# Altium PCB SkateInfoView.PcbDoc
Units mil, origin at the board's own origin, x right, y up, seen from the top; angles counter-clockwise.
Board outline 2500 x 1200 mil, 2 copper layers (Top Layer, Bottom Layer), stack 61.811 mil thick; 20 components, 13 nets, 77 pads, 13 vias.
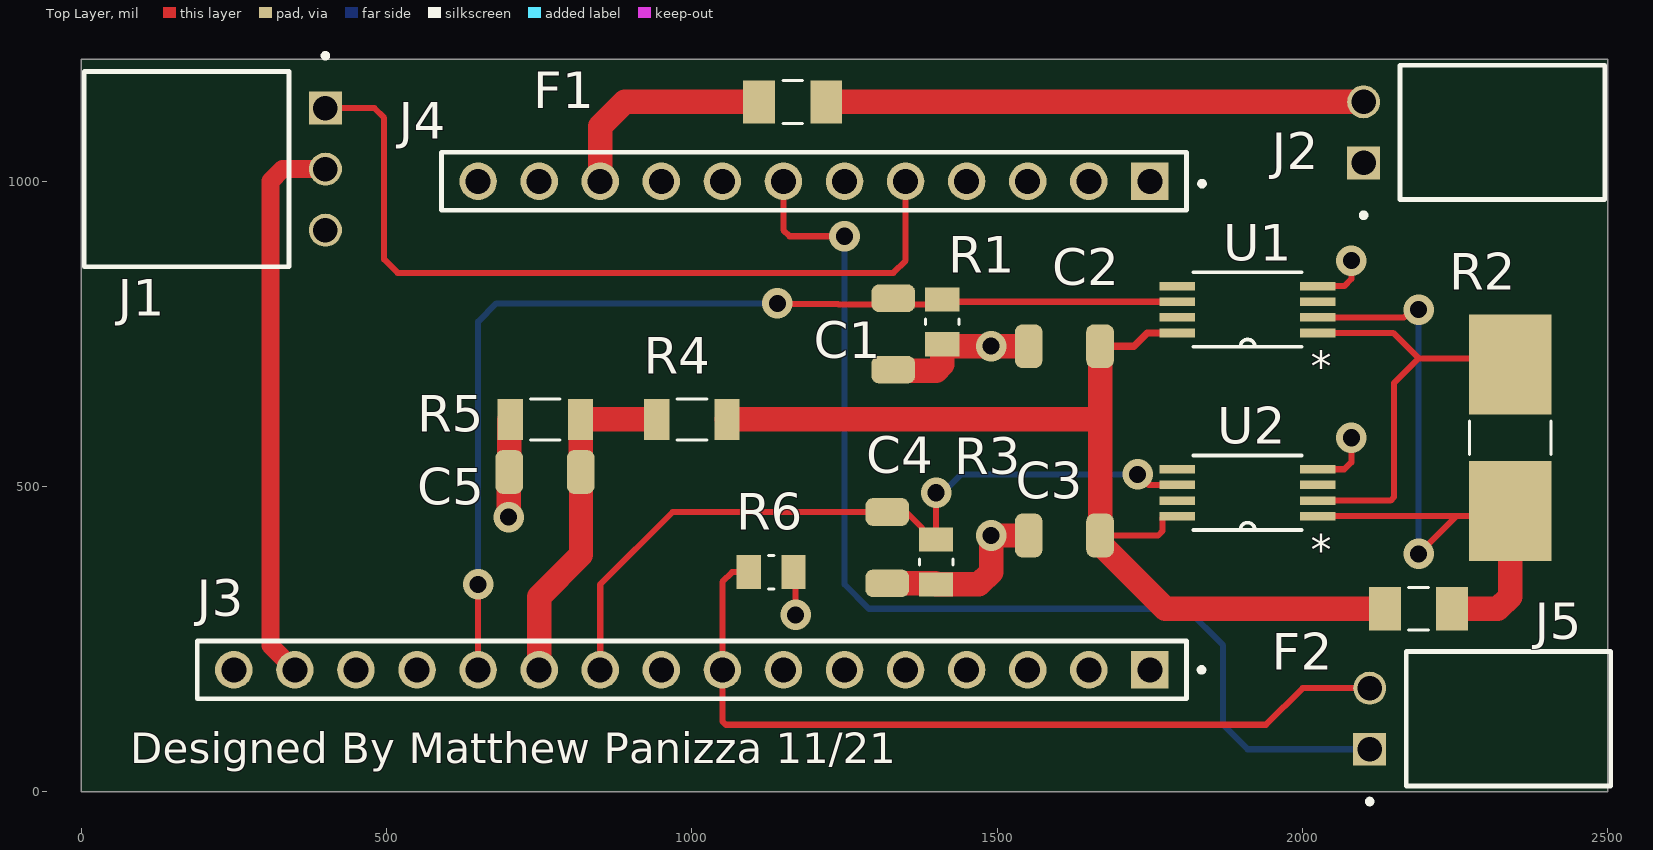
[diagram p0: Top Layer view]
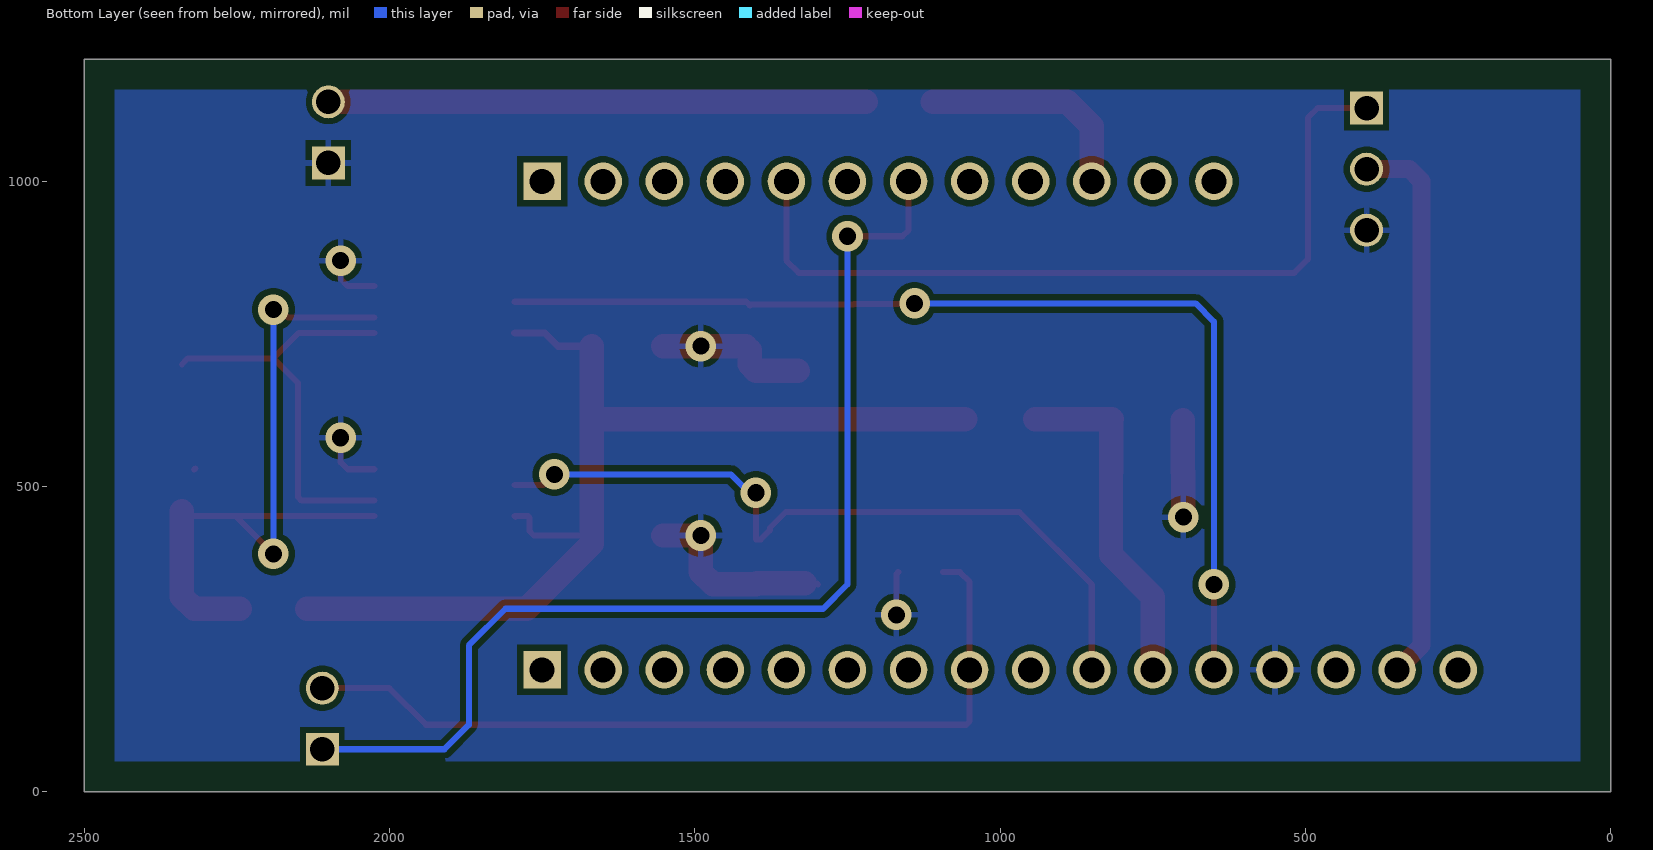
[diagram p1: Bottom Layer view, seen from below]
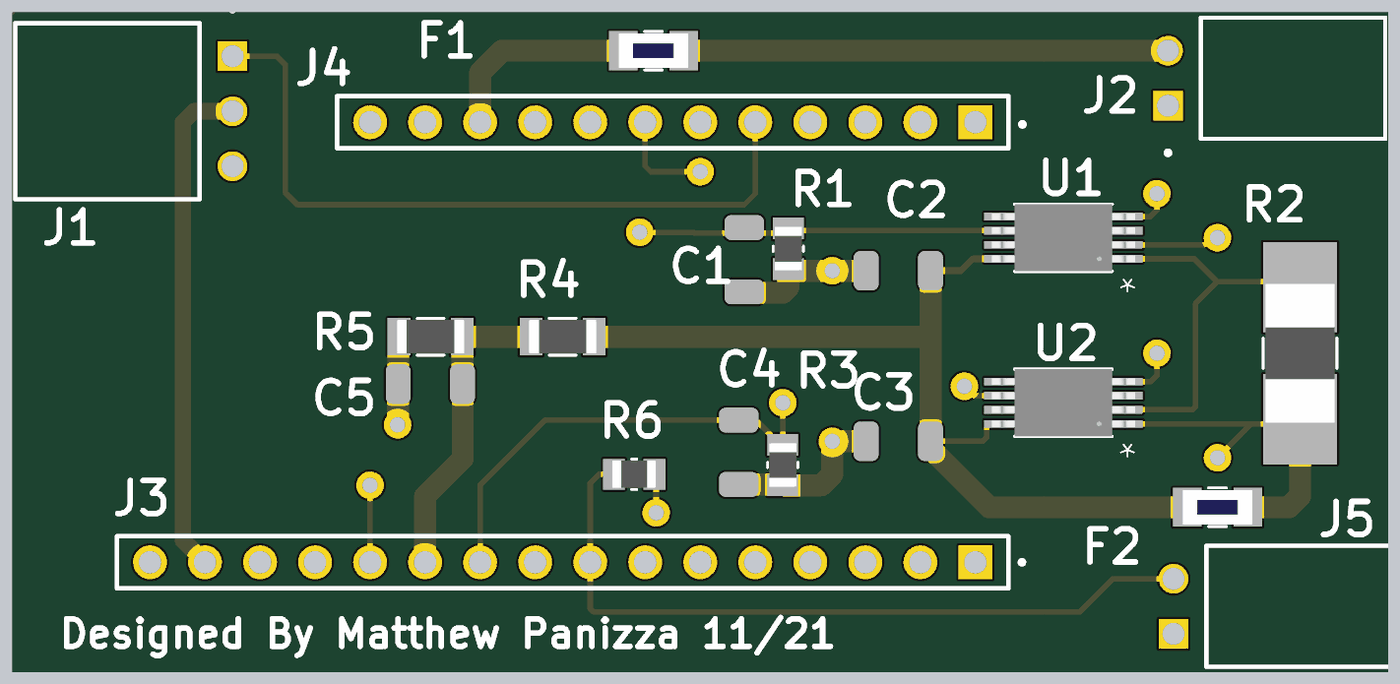
[diagram p2: 3D render of the assembled board from above, using the file's embedded part models]

## Layer stack, top to bottom
Top Solder: solder mask 0.3937, SM-001, Dk 4
Top Layer: signal copper 1.378
Dielectric 1: dielectric 59.0551, FR-4, Dk 4.8
Bottom Layer: signal copper 1.378
Bottom Solder: solder mask 0.3937, SM-001, Dk 4

## Board outline
0,1200 2500,1200 2500,0 0,0

## Design rules (kind name [scope] priority, off if disabled: settings)
Clearance [All] p1: gap=10 ignorepadtopadclearanceinfootprint=TRUE
PolygonConnect [All] p1: connectstyle=Relief reliefconductorwidth=10 reliefentries=4 polygonreliefangle="90 Angle" airgapwidth=10
RoutingVias [All] p1: holewidth=12 width=25 viastyle="Through Hole" minholewidth=12 minwidth=25 maxholewidth=12 maxwidth=25
SolderMaskExpansion [All] p1: expansion=4 istentingtop=FALSE
Width [All] p1: maxlimit=40 minlimit=10 preferedwidth=10
30 further rules are at their usual default settings.

## Components (designator, comment, footprint, x,y, rotation, side; value= is the part's Value field where it differs from the comment)
C1 "50V 10uF" CAP3216X125N 1330,750 r270 top
C2 "50V 10uF" CAP3216X125N 1610,730 r180 top
C3 "50V 10uF" CAP3216X125N 1610,420 r180 top
C4 "50V 10uF" CAP3216X125N 1320,400 r270 top
C5 "50V 10uF" CAP3216X125N 759.54,524 r180 top
F1 "500mA 125V" FUSC3215X78N 1165.08,1130 r0 top
F2 "500mA 125V" FUSC3215X78N 2190,300 r0 top
J1 "3 Pos Hdr" SAMTEC_SSQ-103-02-T-S-RA 172.64,1020 r90 top
J2 "2 Pos Hdr" SAMTEC_SSQ-102-02-T-S-RA 2327.36,1080 r270 top
J3 "16 Pos Hdr" SAMTEC_SSW-116-XX-X-S 1000,200 r180 top
J4 "12 Pos Hdr" SAMTEC_SSW-112-01-X-S 1200,1000 r180 top
J5 "2 Pos Hdr" SAMTEC_SSQ-102-02-T-S-RA 2337.36,120 r270 top
R1 "100k 1%" RESC2012X65N 1410,770 r90 top
R2 "0.001 2W" RESC6432X90N 2340,580 r90 top
R3 "100k 1%" RESC2012X65N 1400,376.81 r90 top
R4 "1M 1%" RESC3115X65N 1000,610 r0 top
R5 "68k 1%" RESC3115X65N 760,610 r0 top
R6 "10k" RESC2012X65N 1130,360 r180 top
U1 "INA169QPWRQ1" PW8 1910,790 r180 top
U2 "INA169QPWRQ1" PW8 1910,490 r180 top

## Footprints (in the part's own frame and the unit in brackets; to place one, negate y for a bottom-side part, rotate by r counter-clockwise, add the part's x,y. Pads: shape width x height; smd on the part's side, far side on the other; paste and mask are expansions set on the pad)
CAP3216X125N [mm]
  rrect54% 1.15x1.82 smd: 1(-1.485,0) 2(1.485,0)
FUSC3215X78N [mm]
  rect 1.32x1.8 smd: 1(-1.395,0) 2(1.395,0)
  silkscreen extent -0.41,-0.89 0.41,0.89, body extent -1.6,-0.79 1.6,0.79, height 0.78
PW8 [mil]
  rect 58x14 smd: 1(-115,38.39) 2(-115,12.8) 3(-115,-12.8) 4(-115,-38.39) 5(115,-38.39) 6(115,-12.8) 7(115,12.8) 8(115,38.39)
  silkscreen extent -89,-61 89,61, body extent -130,-61 130,61, height 47
RESC2012X65N [mm]
  rect 1x1.42 smd: 1(-0.935,0) 2(0.935,0)
  silkscreen extent -0.12,-0.7 0.12,0.7, body extent -1,-0.63 1,0.63, height 0.65
RESC3115X65N [mm]
  rect 1.05x1.72 smd: 1(-1.46,0) 2(1.46,0)
  silkscreen extent -0.62,-0.85 0.62,0.85, body extent -1.55,-0.77 1.55,0.77, height 0.65
RESC6432X90N [mil]
  rect 163.94x134.65 smd: 1(-120,0) 2(120,0)
  silkscreen extent -28,-67 28,67, body extent -126,-63 126,63, height 35
SAMTEC_SSQ-102-02-T-S-RA [mm]
  rect 1.37x1.37 hole 1.02: 01(1.27,-5.775)
  round 1.37 hole 1.02: 02(-1.27,-5.775)
  silkscreen extent -2.8,-5.87 3.54,4.26
SAMTEC_SSQ-103-02-T-S-RA [mm]
  rect 1.37x1.37 hole 1.02: 01(2.54,-5.775)
  round 1.37 hole 1.02: 02(0,-5.775) 03(-2.54,-5.775)
  silkscreen extent -4.07,-5.87 4.81,4.26
SAMTEC_SSW-112-01-X-S [mm]
  rect 1.56x1.56 hole 1.04: 01(-13.97,0)
  round 1.56 hole 1.04: 02(-11.43,0) 03(-8.89,0) 04(-6.35,0) 05(-3.81,0) 06(-1.27,0) 07(1.27,0) 08(3.81,0) 09(6.35,0) 10(8.89,0) 11(11.43,0) 12(13.97,0)
  silkscreen extent -16.24,-1.2 15.5,1.2
SAMTEC_SSW-116-XX-X-S [mm]
  rect 1.56x1.56 hole 1.04: 01(-19.05,0)
  round 1.56 hole 1.04: 02(-16.51,0) 03(-13.97,0) 04(-11.43,0) 05(-8.89,0) 06(-6.35,0) 07(-3.81,0) 08(-1.27,0) 09(1.27,0) 10(3.81,0) 11(6.35,0) 12(8.89,0) 13(11.43,0) 14(13.97,0) 15(16.51,0) 16(19.05,0)
  silkscreen extent -21.3,-1.2 20.58,1.2

## Part data
C1 C2 C3 C4 C5: library part GRT31CR61H106ME01L, "1206 10 uF 50 V Â±20% Tolerance X5R Multilayer Ceramic Capacitor", Package=None, Availability=Unavailable, MF="{'manufacturer': u'Murata Electronics'}", MP=GRT31CR61H106ME01L, Price=None
F1 F2: library part C1Q-500, Package=None, Availability=Unavailable, MF="{'manufacturer': u'Bel Fuse'}", MP=C1Q-500, Price=None
J1: library part SSQ-103-02-T-S-RA, Package=None, Availability=Unavailable, MF="{'manufacturer': u'Samtec'}", MP=SSQ-103-02-T-S-RA, Price=None
J2 J5: library part SSQ-102-02-T-S-RA, Package=None, Availability=Unavailable, MF="{'manufacturer': u'Samtec'}", MP=SSQ-102-02-T-S-RA, Price=None
J3: library part SSW-116-XX-X-S, Package=None, Availability=Unavailable, MF="{'manufacturer': u'Samtec'}", MP=SSW-116-XX-X-S, Price=None
J4: library part SSW-112-01-X-S, "CONN RCPT 12POS 0.1 GOLD PCB", Package=None, Availability=Unavailable, MF="{'manufacturer': u'Samtec'}", MP=SSW-112-01-X-S, Price=None
R1 R3: library part CRG0805F100K, "CRG0805 1% 100K", Package=None, Availability=Unavailable, MF="{'manufacturer': u'TE Connectivity'}", MP=CRG0805F100K, Price=None
R2: library part CRE2512-FZ-R001E-3, Package=None, Availability=Unavailable, MF="{'manufacturer': u'Bourns Inc.'}", MP=CRE2512-FZ-R001E-3, Price=None
R4: library part CRG1206F1M0, "CRG1206 1% 1M0", Package=None, Availability=Unavailable, MF="{'manufacturer': u'TE Connectivity'}", MP=CRG1206F1M0, Price=None
R5: library part CRGCQ1206F68K, "Fixed Resistor CRGCQ 1206 68K 1%", Package=None, Availability=Unavailable, MF="{'manufacturer': u'TE Connectivity'}", MP=CRGCQ1206F68K, Price=None
R6: library part CRGCQ0805J10K, "Fixed Resistor CRGCQ 0805 10K 5%", Package=None, Availability=Unavailable, MF="{'manufacturer': u'TE Connectivity'}", MP=CRGCQ0805J10K, Price=None
U1 U2: "No Description Available", Mfr_Name="Texas Instruments", Copyright="Copyright (C) 2021 Ultra Librarian. All rights reserved.", Manufacturer_Part_Number=INA169QPWRQ1, RefDes=RefDes, Type=DEV

## Via types
v1: diameter 50, hole 28, Top Layer to Bottom Layer, 13 vias

## Nets (pads, with @x,y where several pads share a name; then routed paths per layer and width w, separated by ;. In a path a pad name is that pad's centre, name@x,y a point inside that pad or via, vN(x,y) a via of type N, cw(c..) or ccw(c..) an arc to the next point about the centre after c; other vN are vias at no path point)
5V0: F1.2 J2.02 | length 880
  Top Layer w40: F1.2 J2.02
5V0_MCU: F1.1 J4.10 | length 366.7
  Top Layer w40: J4.10 850,1090 890,1130 F1.1
BATT_IN: F2.2 R2.1 U1.2 U2.1 | length 1222.3
  Top Layer w10: U2.1 2251.61,451.61 ; U1.2 2166.38,777.2 2179.18,790 v1(2190,790) ; v1(2190,390) 2251.61,451.61 ; R2.1@2317.87,530 R2.1@2320,527.87 ; R2.1 2331.61,451.61 2251.61,451.61
  Top Layer w40: F2.2 2320,300 2340,320 R2.1
  Bottom Layer w10: v1(2190,390) v1(2190,790)
BATT_OUT: R2.2 U1.1 U2.2 | length 707.3
  Top Layer w10: U2.2 2144.14,477.2 2150,483.06 2150,670 2190,710 ; U1.1 2148.39,751.61 2190,710 ; R2.2 2330,710 2190,710
GND: C1.2 C2.2 C3.2 C4.2 C5.2 J1.03 J2.01 J3.13 R1.1 R3.1 R5.1 R6.1 U1.4 U2.4 | length 976.9
  Top Layer w10: v1(700,450) v1@700.54,450.54 ; C5.2@700.54,523.46 C5.2 ; R5.1@701.07,608.55 R5.1 ; R6.1 1170,356.81 v1(1170,290) ; C4.2@1298.46,340 C4.2@1300,341.54 ; C1.2 C1.2@1331.54,690 ; R3.1@1398.46,341.54 R3.1 ; R1.1@1410,723.19 R1.1@1416.81,730 ; U2.4 2068.39,528.39 2080,540 v1(2080,580) ; U1.4 2068.39,828.39 2080,840 v1(2080,870)
  Top Layer w40: v1@700.54,450.54 C5.2@700.54,523.46 ; C5.2 R5.1@701.07,608.55 ; C4.2 R3.1@1398.46,341.54 ; C1.2@1331.54,690 1400,690 1410,700 R1.1@1410,723.19 ; R3.1 1470,340 1490,360 v1(1490,420) C3.2 ; R1.1@1416.81,730 v1(1490,730) C2.2
I_SENSE: C1.1 J3.12 R1.2 U1.6 | length 1731.2
  Top Layer w10: J3.12 v1(650,340) ; v1(1140,800) 1140.77,799.23 1239.23,799.23 1240,798.46 1408.35,798.46 1410,796.81 1415.98,802.8 U1.6
  Bottom Layer w10: v1(650,340) 650,770 680,800 v1(1140,800)
I_SENSE_R: C4.1 J3.10 R3.2 U2.6 | length 1250.9
  Top Layer w10: J3.10 850,340 968.46,458.46 1300,458.46 1350.83,458.46 1377.05,432.24 1377.05,428.31 1391.73,413.62 R3.2 v1(1400,490) ; v1(1730,520) 1730.82,520 1748.03,502.8 U2.6
  Bottom Layer w10: v1(1400,490) 1410.82,490 1440.82,520 v1(1730,520)
SENSE_SUPP: C2.1 C3.1 F2.1 R4.2 U1.8 U2.8 | length 1740.8
  Top Layer w10: C3.1@1668.46,406.81 1681.65,420 1763.39,420 1771,427.61 1771,449.61 1773,451.61 U2.8 U2.8@1793.39,450
  Top Layer w12: C2.1 1723.94,730 1745.55,751.61 U1.8
  Top Layer w40: R4.2 1668.46,610 ; C2.1 1668.46,610 ; F2.1 1775.28,300 1668.46,406.81 C3.1 1668.46,610
TACH_3V3: J1.02 J3.15 | length 914.9
  Top Layer w30: J3.15 310,240 310,1000 330,1020 J1.02
TACH_PWM: J1.01 J4.05 | length 1335.7
  Top Layer w10: J1.01 480,1120 496.06,1103.94 496.06,872.42 518.48,850 1330,850 1350,870 J4.05
THERM_PWR: J4.07 J5.01 | length 1802.1
  Top Layer w10: J4.07 1150,920 1160,910 v1(1250,910)
  Bottom Layer w10: v1(1250,910) 1250,340 1290,300 1810,300 1870,240 1870,110 1910,70 J5.01
THERM_SENSE: J3.08 J5.02 R6.2 | length 1365.3
  Top Layer w10: R6.2 1065.86,360 1050,344.14 J3.08 1050,115.86 1055.86,110 1940,110 2000,170 J5.02
V_SENSE: C5.1 J3.11 R4.1 R5.2 | length 563.8
  Top Layer w10: R5.2 R5.2@818,609.48 ; C5.1 C5.1@818.46,523.54
  Top Layer w40: J3.11 750,320 818.46,388.46 C5.1@818.46,523.54 ; R5.2 R4.1 ; C5.1 R5.2@818,609.48
pads on no net: J3.01 J3.02 J3.03 J3.04 J3.05 J3.06 J3.07 J3.09 J3.14 J3.16 J4.01 J4.02 J4.03 J4.04 J4.06 J4.08 J4.09 J4.11 J4.12 U1.3 U1.5 U1.7 U2.3 U2.5 U2.7

## Polygon pours and split planes (outlines as drawn)
GND on Bottom Layer "GND_L02_P001" (solid, pour order 1): 50,1150 2450,1150 2450,50 50,50

## Silkscreen, mask and mechanical layers (free items; w line width, h text height)
Top Overlay:
  text "Designed By Matthew Panizza 11/21" at 80,46.66 h50
Mechanical 1:
  lines w10: 0,100 ccw(c100,100) 100,0 2400,0 ccw(c2400,100) 2500,100 2500,1100 ccw(c2400,1100) 2400,1200 100,1200 ccw(c100,1100) 0,1100 0,100

## Dimensions
2514.72,0.12 to 2504.72,1199.88 on Top Layer
0,1200 to 2504.72,1199.88 on Top Layer

## Text inside footprints (layer, text, board x,y; h text height)
U1: Top Overlay "*" at 2047.5,742.61 h50 r180; Mechanical 13 "*" at 2047.5,742.61 h50 r180
U2: Top Overlay "*" at 2047.5,442.61 h50 r180; Mechanical 13 "*" at 2047.5,442.61 h50 r180